# Altium PCB PCB_Lumo_Squisho.PcbDoc
Units mil, origin at the board's own origin, x right, y up, seen from the top; angles counter-clockwise.
Board outline 3070.87 x 2775.59 mil, 4 copper layers (Top Layer, MID_1, MID_2, Bottom Layer), stack 23.756 mil thick; 36 components, 37 nets, 173 pads, 58 vias.
Unrouted connection lines stored in the file: 1.
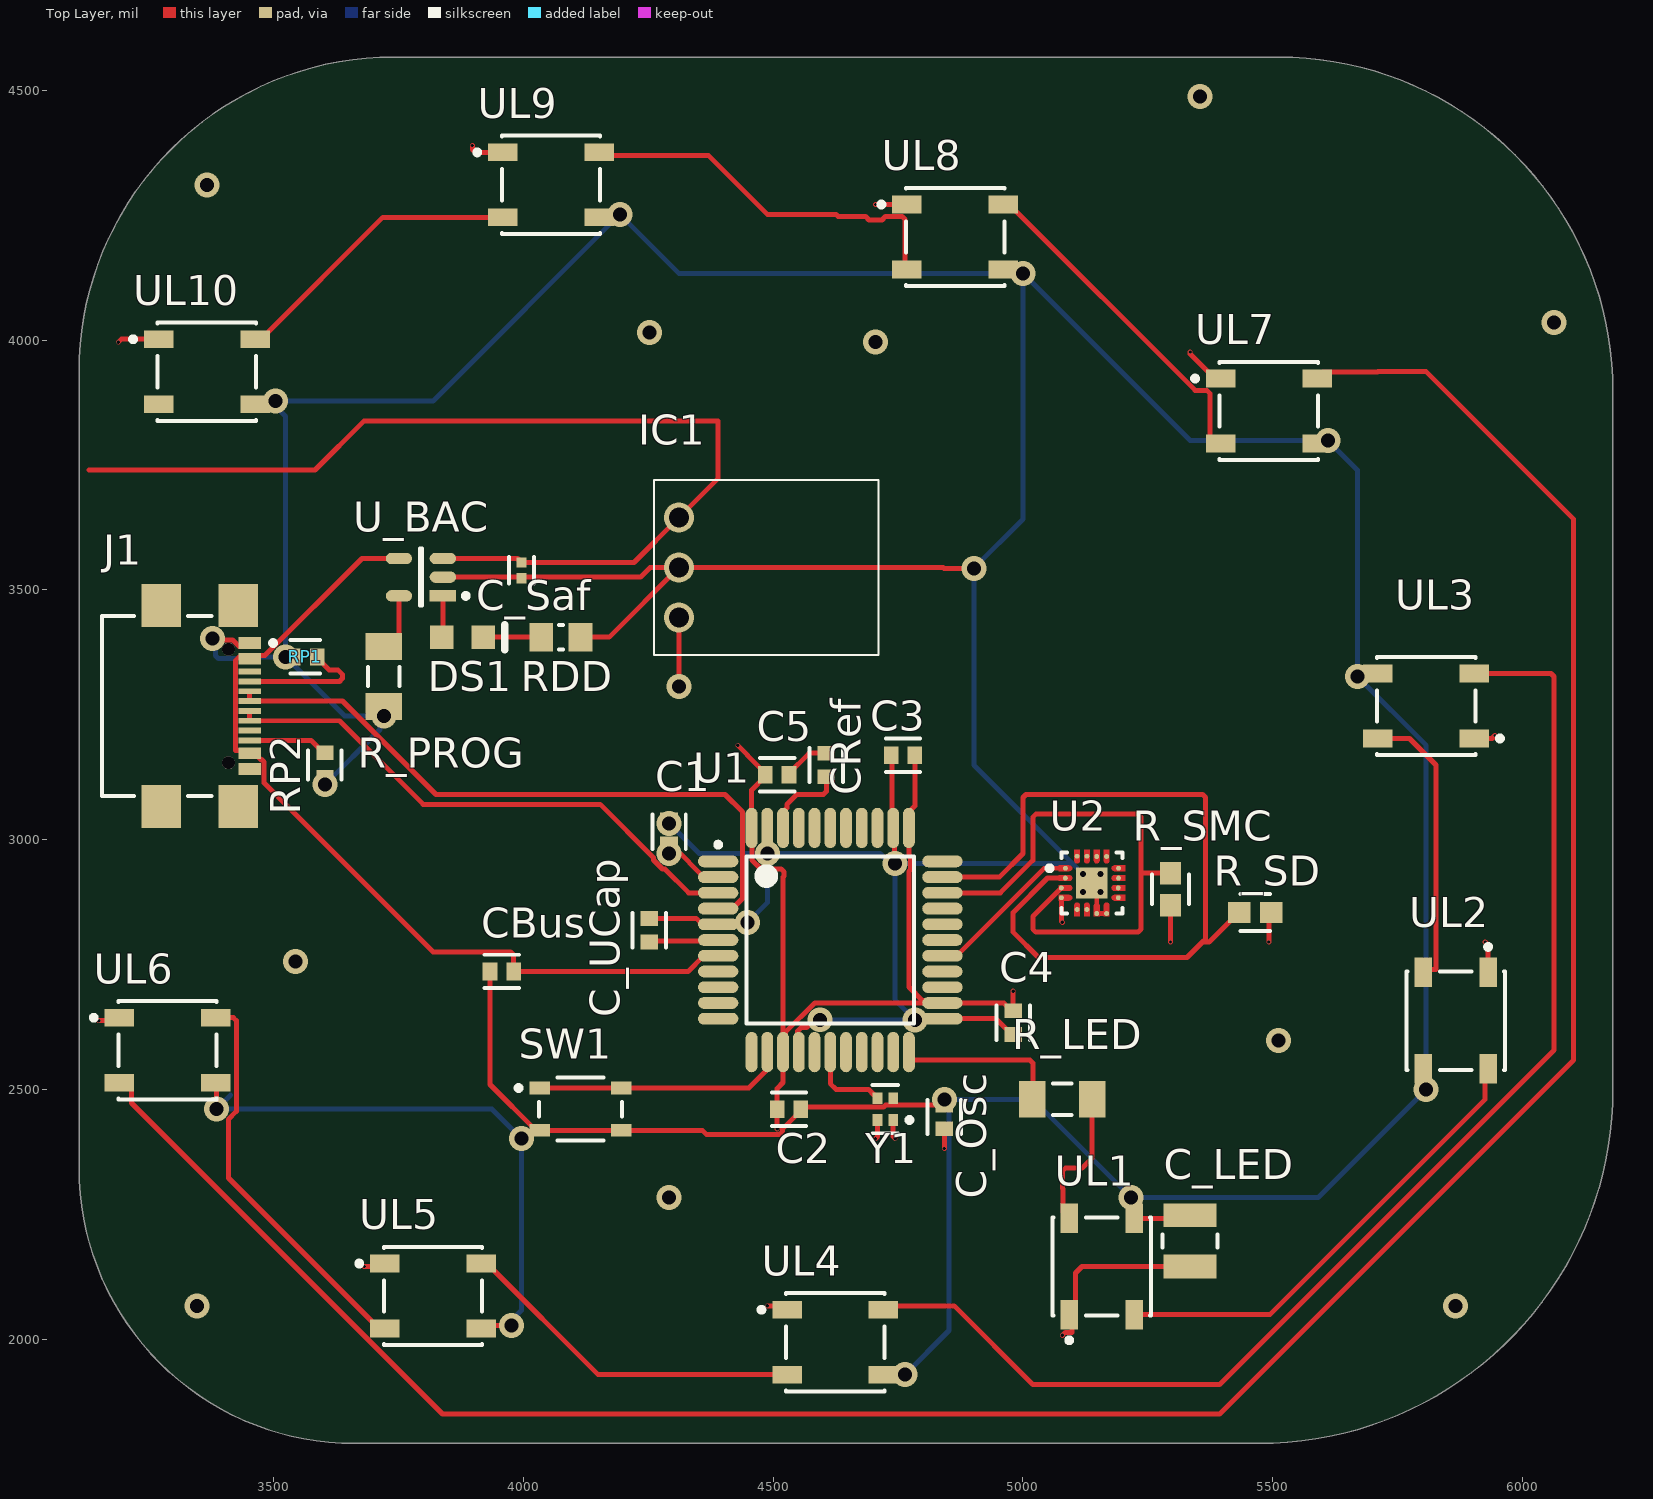
[diagram p0: Top Layer view]
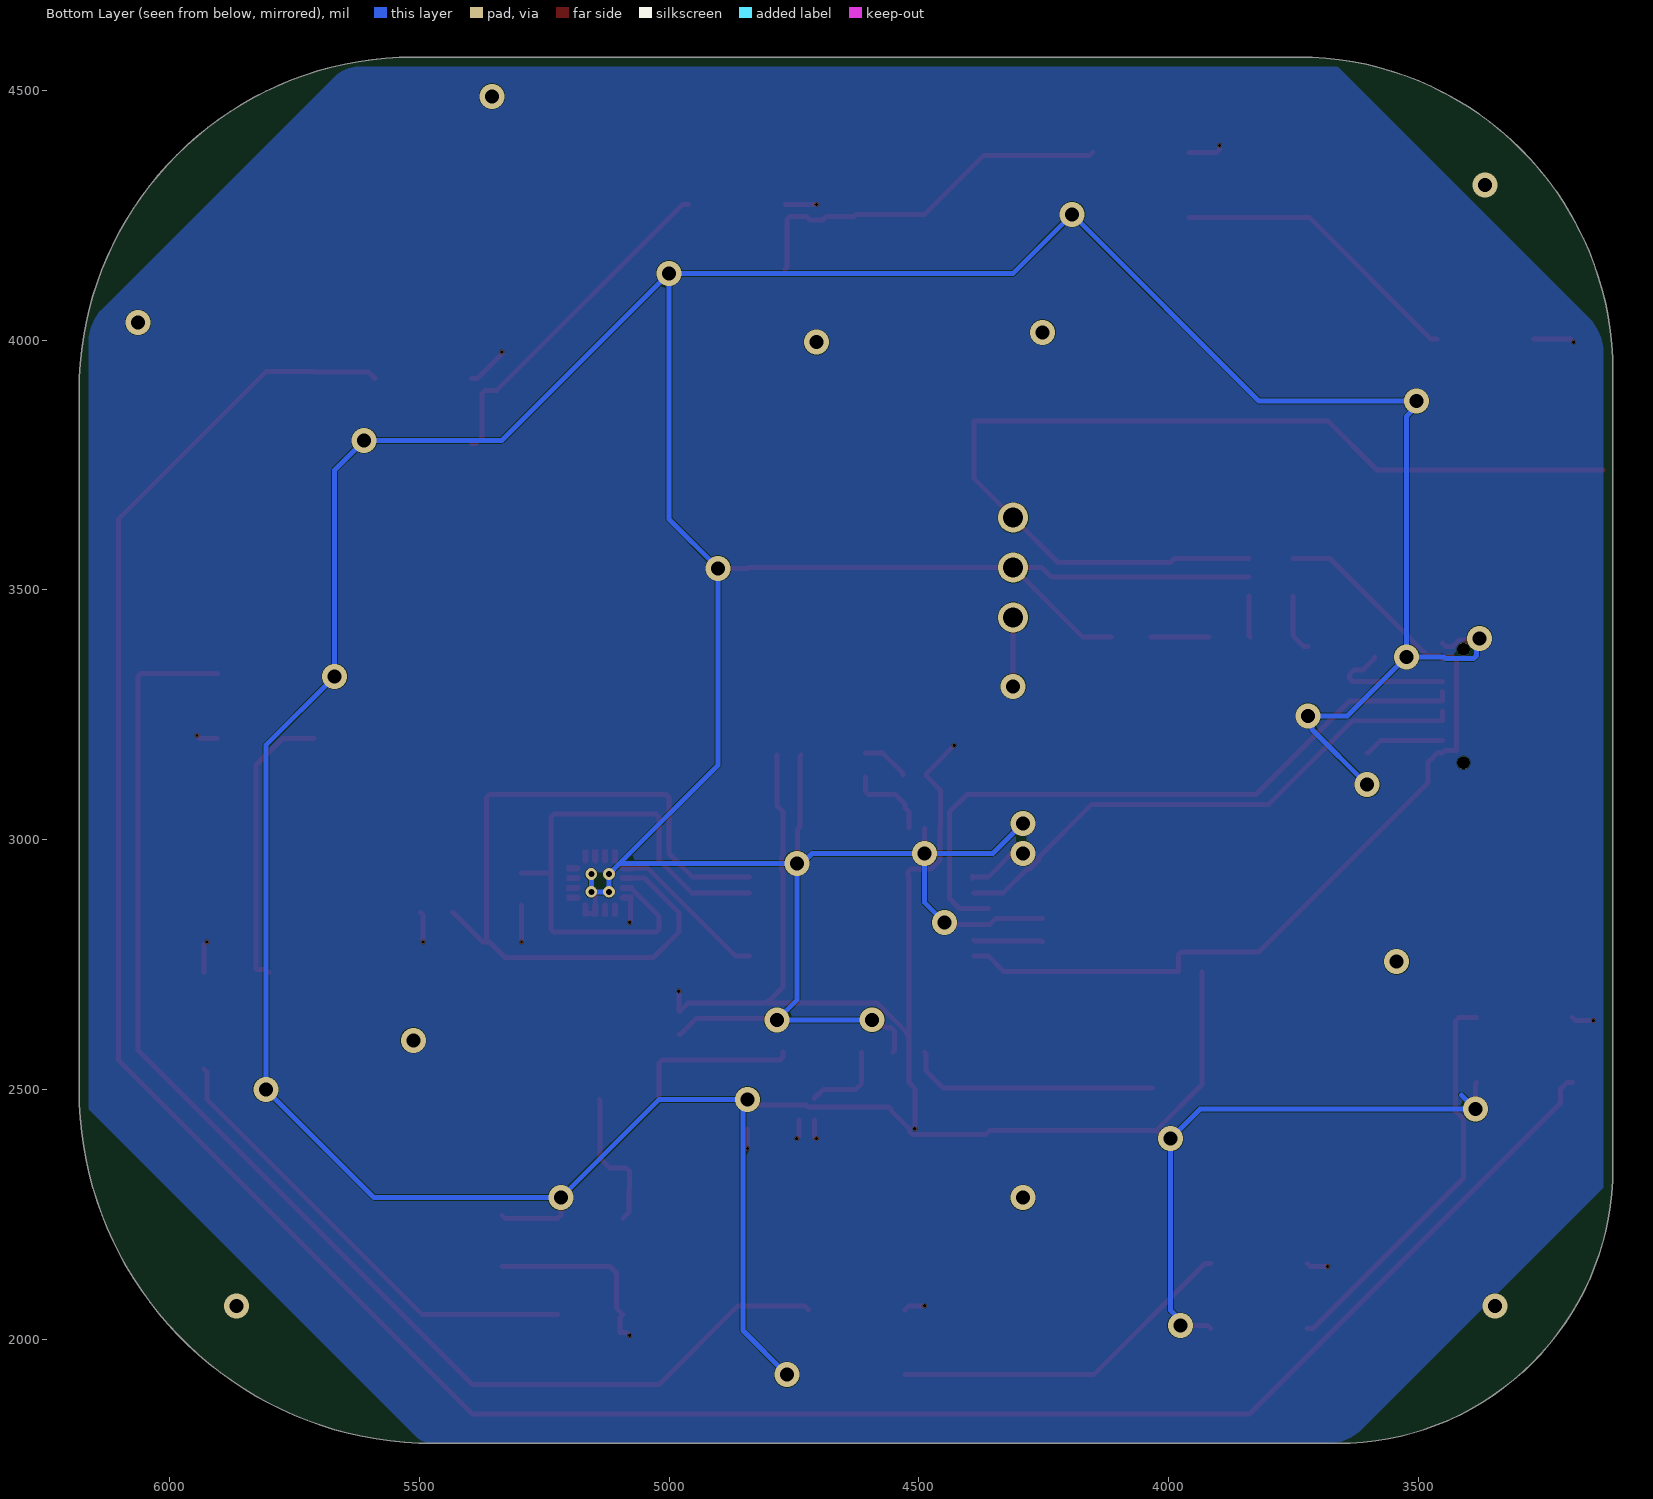
[diagram p1: Bottom Layer view, seen from below]
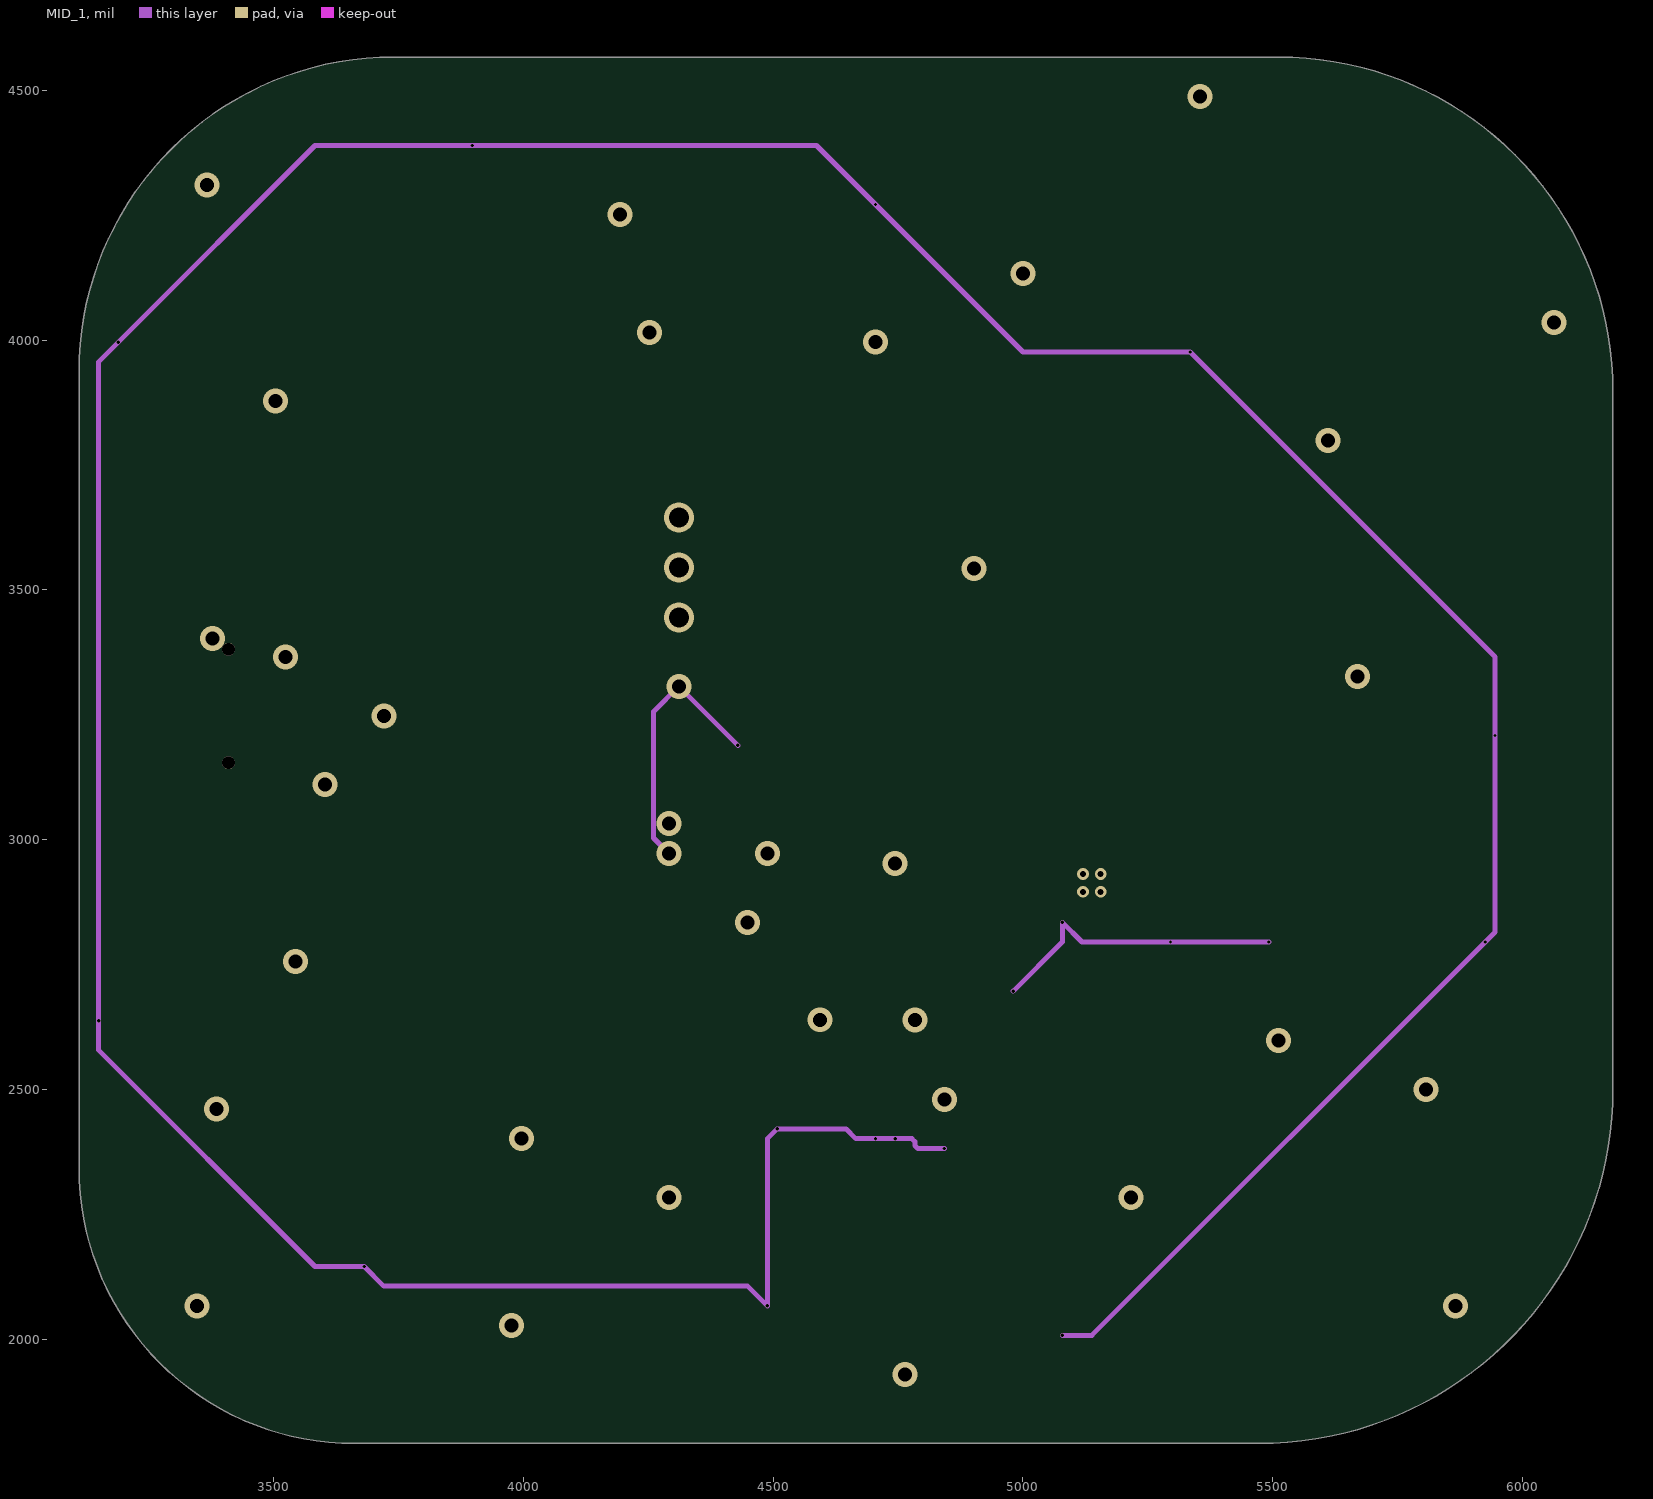
[diagram p2: MID_1]
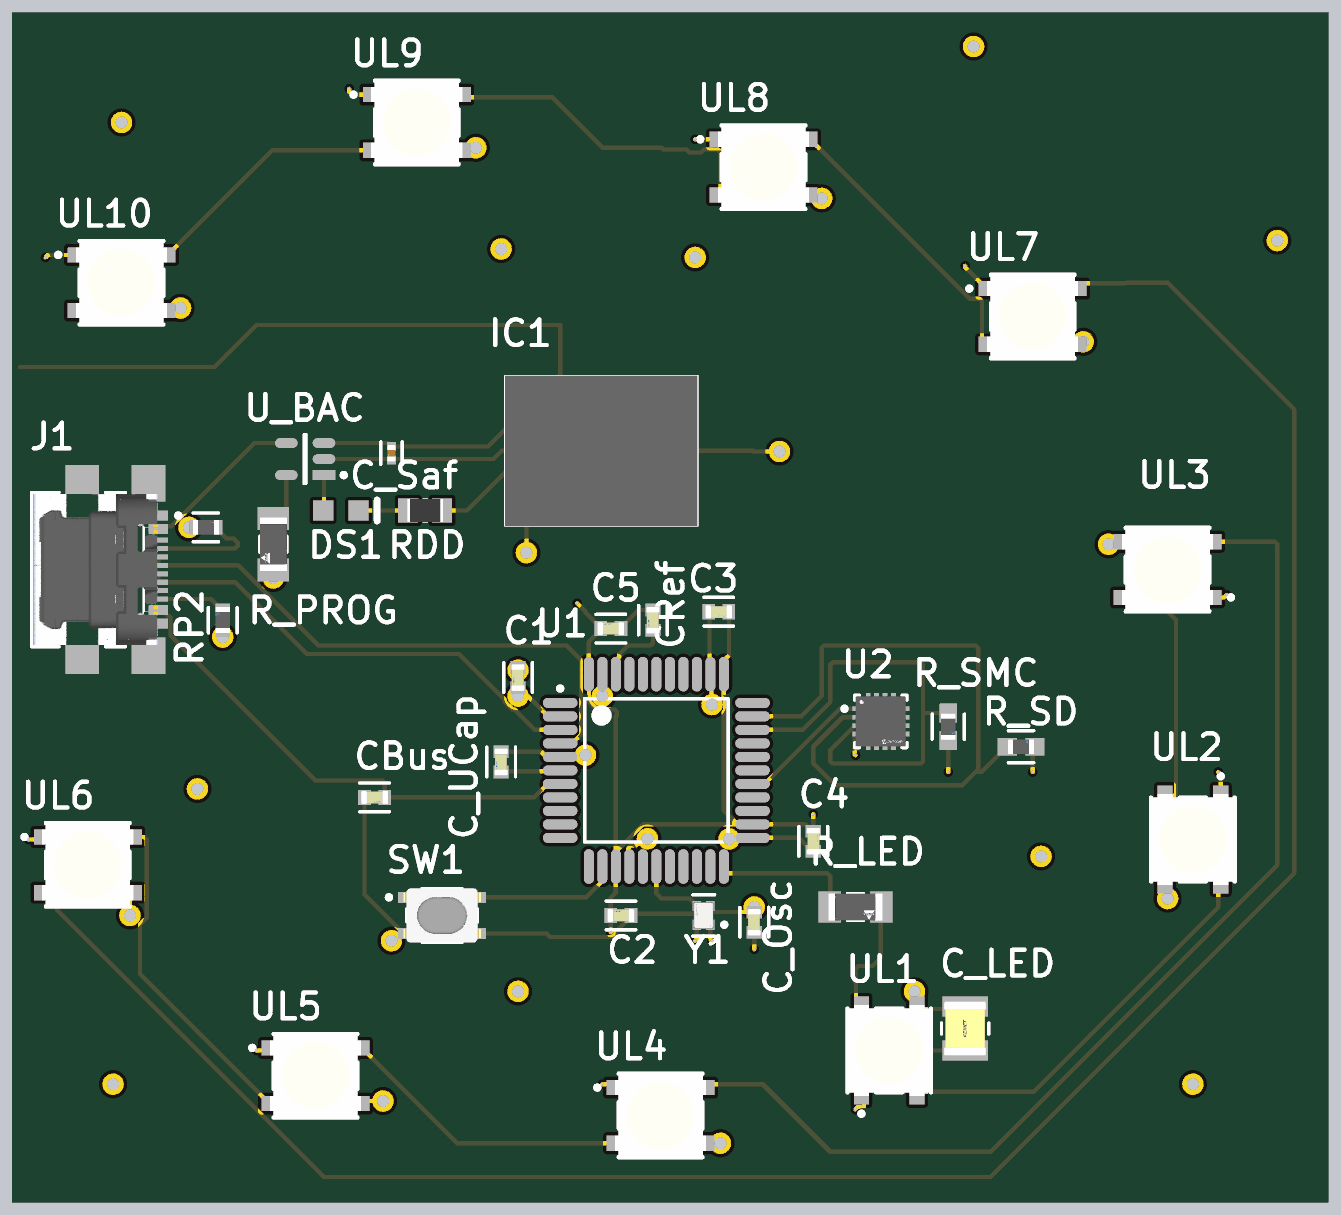
[diagram p3: 3D render of the assembled board from above, using the file's embedded part models]

## Layer stack, top to bottom
Top Solder: solder mask 0.4, Solder Resist, Dk 3.5
Top Layer: signal copper 1.4
Dielectric 2: prepreg 2.8, PP-006, Dk 4.1
MID_1: signal copper 1.378
Dielectric 1: dielectric 12.6, FR-4, Dk 4.8
MID_2: signal copper 1.378
Dielectric 3: prepreg 2.8, PP-006, Dk 4.1
Bottom Layer: signal copper 1.4
Bottom Solder: solder mask 0.4, Solder Resist, Dk 3.5

## Board outline
3661.42,1791.34 5472.44,1791.34 ccw(c5472.44,2500) 6181.1,2500 6181.1,3897.64 ccw(c5511.81,3897.64) 5511.81,4566.93 3740.16,4566.93 ccw(c3740.15,3937.01) 3110.24,3937.01 3110.24,2342.52 ccw(c3661.42,2342.52)

## Design rules (kind name [scope] priority, off if disabled: settings)
Clearance [All] p1: gap=1 ignorepadtopadclearanceinfootprint=FALSE
PolygonConnect [All] p1: connectstyle=Relief reliefconductorwidth=10 reliefentries=4 polygonreliefangle="90 Angle" airgapwidth=10
RoutingVias [All] p1: holewidth=28 width=50 viastyle="Through Hole" minholewidth=28 minwidth=50 maxholewidth=28 maxwidth=50
SilkToSilkClearance [All] p1: silktosilkclearance=1
SolderMaskExpansion [All] p1: expansion=8 istentingtop=FALSE
SupplyNets "Schematic Supply Nets" [InNet('GND')] p1: voltage=0.000
Width [All] p1: maxlimit=10 minlimit=10 preferedwidth=10
29 further rules are at their usual default settings.

## Components (designator, comment, footprint, x,y, rotation, side; value= is the part's Value field where it differs from the comment)
C1 "C0603C104K4RACTU" FP-C0603C-CF-MFG 4291.34,3015.75 r90 top value="0.10 μF"
C2 "C0603C104K4RACTU" FP-C0603C-CF-MFG 4531.5,2460.63 r0 top value="0.10 μF"
C3 "C0603C104K4RACTU" FP-C0603C-CF-MFG 4759.84,3169.29 r180 top value="0.10 μF"
C4 "C0603C104K4RACTU" FP-C0603C-CF-MFG 4980.31,2633.86 r270 top value="0.10 μF"
C5 "C0603C104K4RACTU" FP-C0603C-CF-MFG 4507.87,3129.92 r0 top value="0.10 μF"
C_LED "C1210C107M4PACTU" FP-C1210C-FS-MFG 5334.65,2196.85 r90 top
C_Osc "C0603C104K4RACTU" FP-C0603C-CF-MFG 4842.52,2444.88 r90 top value="0.10 μF"
C_Saf "C0402C105K8PACTU" FP-C0402C105K8PACTU-MFG 3996.06,3539.37 r270 top
C_UCap "C0603C104K4RACTU" FP-C0603C-CF-MFG 4251.97,2818.9 r90 top value="0.10 μF"
CBus "C0603C104K4RACTU" FP-C0603C-CF-MFG 3956.69,2736.22 r180 top value="0.10 μF"
CRef "C0603C104K4RACTU" FP-C0603C-CF-MFG 4606.3,3149.61 r90 top value="0.10 μF"
DS1 "HSMG-C170" AVAG-HSMX-C170_V 3877.95,3405.51 r0 top
IC1 "U1V10F5" U1V10F5 4311.02,3644.88 r270 top
J1 "USB4110-GF-A" FP-USB4110-GF-A-MFG 3307.09,3267.72 r270 top
R_LED "CRCW1206330RFKEA" FP-CRCW1206-e3-IPC_A 5078.74,2480.32 r0 top
R_PROG "CRCW12062K00FKEA" FP-CRCW1206-e3-IPC_A 3720.47,3326.77 r270 top
R_SD "CRCW06034K70FKEA" FP-CRCW0603-e3-IPC_A 5465.17,2854.33 r0 top
R_SMC "CRCW06034K70FKEA" FP-CRCW0603-e3-IPC_A 5295.28,2900.97 r270 top
RDD "RC0805FR-071KL" RESC2013X60X35ML10T20 4074.8,3405.51 r0 top
RP1 "CRCW06035K10FKEA" FP-CRCW0603-e3-IPC_C 3562.99,3366.14 r0 top
RP2 "CRCW06035K10FKEA" FP-CRCW0603-e3-IPC_C 3602.36,3149.61 r90 top
SW1 "PTS810SJM250SMTRLFS" FP-PTS810SJM250SMTRLFS-MFG 4114.17,2460.63 r0 top
U1 "ATmega32U4-AU" 44ML_M 4614.17,2799.21 r0 top
U2 "CAP1208-1-A4-TR" FP-CAP1208-1-A4-TR-MFG 5137.8,2913.39 r0 top
U_BAC "MCP73831T-2ACI/OT" FP-C04-091-OT-IPC_B 3794.64,3525.59 r180 top
UL1 "1655" ADA-RGB-1655_V 5157.48,2145.67 r90 top
UL2 "1655" ADA-RGB-1655_V 5866.14,2637.8 r270 top
UL3 "1655" ADA-RGB-1655_V 5807.09,3267.72 r180 top
UL4 "1655" ADA-RGB-1655_V 4624.02,1994.09 r0 top
UL5 "1655" ADA-RGB-1655_V 3818.9,2086.61 r0 top
UL6 "1655" ADA-RGB-1655_V 3287.4,2578.74 r0 top
UL7 "1655" ADA-RGB-1655_V 5492.13,3858.27 r0 top
UL8 "1655" ADA-RGB-1655_V 4864.17,4206.69 r0 top
UL9 "1655" ADA-RGB-1655_V 4055.12,4311.02 r0 top
UL10 "1655" ADA-RGB-1655_V 3366.14,3937.01 r0 top
Y1 "ASCO-16.000MHZ-EK-T" FP-ASCO-MFG 4724.41,2460.63 r90 top

## Footprints (in the part's own frame and the unit in brackets; to place one, negate y for a bottom-side part, rotate by r counter-clockwise, add the part's x,y. Pads: shape width x height; smd on the part's side, far side on the other; paste and mask are expansions set on the pad)
44ML_M [mm] "Thin QFP, 44-Leads, Body 10x10mm, Pitch 0.8mm, IPC Low Density"
  oval 2.05x0.6 smd: 1(-5.7,4) 2(-5.7,3.2) 3(-5.7,2.4) 4(-5.7,1.6) 5(-5.7,0.8) 6(-5.7,0) 7(-5.7,-0.8) 8(-5.7,-1.6) 9(-5.7,-2.4) 10(-5.7,-3.2) 11(-5.7,-4) 23(5.7,-4) 24(5.7,-3.2) 25(5.7,-2.4) 26(5.7,-1.6) 27(5.7,-0.8) 28(5.7,0) 29(5.7,0.8) 30(5.7,1.6) 31(5.7,2.4) 32(5.7,3.2) 33(5.7,4)
  oval 0.6x2.05 smd: 12(-4,-5.7) 13(-3.2,-5.7) 14(-2.4,-5.7) 15(-1.6,-5.7) 16(-0.8,-5.7) 17(0,-5.7) 18(0.8,-5.7) 19(1.6,-5.7) 20(2.4,-5.7) 21(3.2,-5.7) 22(4,-5.7) 34(4,5.7) 35(3.2,5.7) 36(2.4,5.7) 37(1.6,5.7) 38(0.8,5.7) 39(0,5.7) 40(-0.8,5.7) 41(-1.6,5.7) 42(-2.4,5.7) 43(-3.2,5.7) 44(-4,5.7)
  silkscreen extent -5.82,-4.25 4.25,4.97, body extent -5,-5 5,5, height 1.2
ADA-RGB-1655_V [mm] "SMD, 4-Leads, Body 5x5mm"
  rect 1.5x0.9 smd: 1(-2.45,1.65) 2(-2.45,-1.65) 3(2.45,-1.65) 4(2.45,1.65)
  silkscreen extent -3.87,-2.5 2.5,2.5, body extent -2.7,-2.5 2.7,2.5, height 1.68
AVAG-HSMX-C170_V [mm] "SMD, 2-Leads, Body 2x1.25mm, Height 0.8mm"
  rect 1.2x1.2 smd: 1(-1.05,0) 2(1.05,0)
  silkscreen extent 2.15,-0.63 2.15,0.63, body extent -1,-0.63 1,0.63, height 0.8
FP-ASCO-MFG [mm]
  rect 0.6x0.5 smd paste+0 mask+0: 1(-0.55,-0.4) 2(0.55,-0.4) 3(0.55,0.4) 4(-0.55,0.4)
  silkscreen extent -1.22,-1.35 1.22,0.65, body extent -0.95,-0.75 0.95,0.75, height 0.25
FP-C04-091-OT-IPC_B [mm]
  rect 1.338x0.578 smd paste+0 mask+0: 1(-1.116,0.95)
  rrect100% 1.338x0.578 smd paste+0 mask+0: 2(-1.116,0) 3(-1.116,-0.95) 4(1.116,-0.95) 5(1.116,0.95)
  silkscreen extent -2.41,-1.45 0.05,1.45
FP-C0402C105K8PACTU-MFG [mm]
  rect 0.52x0.52 smd paste+0 mask+0: 1(-0.4,0) 2(0.4,0)
  silkscreen extent -0.67,-0.64 0.67,0.64, body extent -0.8,-0.4 0.8,0.4, height 0.25
FP-C0603C-CF-MFG [mm]
  rect 0.75x0.9 smd paste+0 mask+0: 1(-0.6,0) 2(0.6,0)
  silkscreen extent -0.87,-0.85 0.88,0.85, body extent -1.2,-0.6 1.2,0.6, height 0.25
FP-C1210C-FS-MFG [mm]
  rect 1.2x2.7 smd paste+0 mask+0: 1(-1.3,0) 2(1.3,0)
  silkscreen extent -0.33,-1.4 0.33,1.4, body extent -2,-1.5 2,1.5, height 0.25
FP-CAP1208-1-A4-TR-MFG [mm]
  round 0.252 smd paste+0 mask+0: 1(-1.345,0.75) 2(-1.345,0.25) 3(-1.55,-0.25) 4(-1.55,-0.75) 5(-0.75,-1.345) 6(-0.25,-1.345) 7(0.25,-1.55) 8(0.75,-1.55) 9(1.345,-0.75) 10(1.345,-0.25) 11(1.359,0.25) 12(1.359,0.75) 13(0.75,1.345) 14(0.25,1.345) 15(-0.25,1.359) 16(-0.75,1.359)
  rect 1.6x1.6 smd paste+0 mask+0: 17(0,0)
  Top Layer region: -0.61,1.69 -0.61,1.14 -0.621,1.086 -0.651,1.041 -0.696,1.011 -0.75,1 -0.75,1 -0.804,1.011 -0.849,1.041 -0.879,1.086 -0.89,1.14 -0.89,1.14 -0.89,1.69
  Top Layer region: -0.11,1.69 -0.11,1.14 -0.121,1.086 -0.151,1.041 -0.196,1.011 -0.25,1 -0.25,1 -0.304,1.011 -0.349,1.041 -0.379,1.086 -0.39,1.14 -0.39,1.14 -0.39,1.69
  Top Layer region: 0.39,1.69 0.39,1.14 0.379,1.086 0.349,1.041 0.304,1.011 0.25,1 0.25,1 0.196,1.011 0.151,1.041 0.121,1.086 0.11,1.14 0.11,1.14 0.11,1.69
  Top Layer region: 0.89,1.69 0.89,1.14 0.879,1.086 0.849,1.041 0.804,1.011 0.75,1 0.75,1 0.696,1.011 0.651,1.041 0.621,1.086 0.61,1.14 0.61,1.14 0.61,1.69
  Top Layer region: 1.69,0.61 1.14,0.61 1.086,0.621 1.041,0.651 1.011,0.696 1,0.75 1,0.75 1.011,0.804 1.041,0.849 1.086,0.879 1.14,0.89 1.14,0.89 1.69,0.89
  Top Layer region: 1.69,0.11 1.14,0.11 1.086,0.121 1.041,0.151 1.011,0.196 1,0.25 1,0.25 1.011,0.304 1.041,0.349 1.086,0.379 1.14,0.39 1.14,0.39 1.69,0.39
  Top Layer region: 1.69,-0.39 1.14,-0.39 1.086,-0.379 1.041,-0.349 1.011,-0.304 1,-0.25 1,-0.25 1.011,-0.196 1.041,-0.151 1.086,-0.121 1.14,-0.11 1.14,-0.11 1.69,-0.11
  Top Layer region: 1.69,-0.89 1.14,-0.89 1.086,-0.879 1.041,-0.849 1.011,-0.804 1,-0.75 1,-0.75 1.011,-0.696 1.041,-0.651 1.086,-0.621 1.14,-0.61 1.14,-0.61 1.69,-0.61
  Top Layer region: 0.61,-1.69 0.61,-1.14 0.621,-1.086 0.651,-1.041 0.696,-1.011 0.75,-1 0.75,-1 0.804,-1.011 0.849,-1.041 0.879,-1.086 0.89,-1.14 0.89,-1.14 0.89,-1.69
  Top Layer region: 0.11,-1.69 0.11,-1.14 0.121,-1.086 0.151,-1.041 0.196,-1.011 0.25,-1 0.25,-1 0.304,-1.011 0.349,-1.041 0.379,-1.086 0.39,-1.14 0.39,-1.14 0.39,-1.69
  Top Layer region: -0.39,-1.69 -0.39,-1.14 -0.379,-1.086 -0.349,-1.041 -0.304,-1.011 -0.25,-1 -0.25,-1 -0.196,-1.011 -0.151,-1.041 -0.121,-1.086 -0.11,-1.14 -0.11,-1.14 -0.11,-1.69
  Top Layer region: -0.89,-1.69 -0.89,-1.14 -0.879,-1.086 -0.849,-1.041 -0.804,-1.011 -0.75,-1 -0.75,-1 -0.696,-1.011 -0.651,-1.041 -0.621,-1.086 -0.61,-1.14 -0.61,-1.14 -0.61,-1.69
  Top Layer region: -1.69,-0.61 -1.14,-0.61 -1.086,-0.621 -1.041,-0.651 -1.011,-0.696 -1,-0.75 -1,-0.75 -1.011,-0.804 -1.041,-0.849 -1.086,-0.879 -1.14,-0.89 -1.14,-0.89 -1.69,-0.89
  Top Layer region: -1.69,-0.11 -1.14,-0.11 -1.086,-0.121 -1.041,-0.151 -1.011,-0.196 -1,-0.25 -1,-0.25 -1.011,-0.304 -1.041,-0.349 -1.086,-0.379 -1.14,-0.39 -1.14,-0.39 -1.69,-0.39
  Top Layer region: -1.69,0.39 -1.14,0.39 -1.086,0.379 -1.041,0.349 -1.011,0.304 -1,0.25 -1,0.25 -1.011,0.196 -1.041,0.151 -1.086,0.121 -1.14,0.11 -1.14,0.11 -1.69,0.11
  Top Layer region: -1.69,0.89 -1.14,0.89 -1.086,0.879 -1.041,0.849 -1.011,0.804 -1,0.75 -1,0.75 -1.011,0.696 -1.041,0.651 -1.086,0.621 -1.14,0.61 -1.14,0.61 -1.69,0.61
  silkscreen extent -2.27,-1.55 1.55,1.55, body extent -1.79,-1.79 1.79,1.79, height 0.25
FP-CRCW0603-e3-IPC_A [mil]
  rect 44.69x41.82 smd paste+0 mask+0: 1(-32.1,0) 2(32.1,0)
  silkscreen extent -30,-37 30,37, body extent -74,-41 74,41, height 10
FP-CRCW0603-e3-IPC_C [mil]
  rect 28.94x33.94 smd paste+0 mask+0: 1(-24.23,0) 2(24.23,0)
  silkscreen extent -30,-33 30,33, body extent -43,-23 43,23, height 10
FP-CRCW1206-e3-IPC_A [mil]
  rect 53.39x73.16 smd paste+0 mask+0: 1(-60.08,0) 2(60.08,0)
  silkscreen extent -19,-31 19,31, body extent -106,-56 106,56, height 10
FP-PTS810SJM250SMTRLFS-MFG [mm]
  rect 1.05x0.65 smd paste+0 mask+0: 1(-2.075,1.075) 2(2.075,1.075) 3(-2.075,-1.075) 4(2.075,-1.075)
  silkscreen extent -3.27,-1.6 2.1,1.6, body extent -2.7,-1.7 2.7,1.7, height 0.25
FP-USB4110-GF-A-MFG [mm]
  rect 2.18x2 smd paste+0 mask+0: 1(-5.11,3.105) 2(5.11,3.105) 3(-5.11,-0.825) 4(5.11,-0.825)
  rect 0.6x1.15 smd paste+0 mask+0: A1-B12(-3.2,3.68) A4-B9(-2.4,3.68) B1-A12(3.2,3.68) B4-A9(2.4,3.68)
  rect 0.3x1.15 smd paste+0 mask+0: A5(-1.25,3.68) A6(-0.25,3.68) A7(0.25,3.68) A8(1.25,3.68) B5(1.75,3.68) B6(0.75,3.68) B7(-0.75,3.68) B8(-1.75,3.68)
  round 0.65 hole 0.65 unplated paste-2539.97 mask+0: ""(-2.89,2.605) ""(2.89,2.605)
  silkscreen extent -4.57,-3.83 4.57,4.99, body extent -6.3,-3.92 6.3,4.36, height 0.25
RESC2013X60X35ML10T20 [mm] "Chip Resistor, 2-Leads, Body 2.1x1.35mm, IPC Low Density"
  rect 1.2x1.45 smd: 1(-1,0) 2(1,0)
  silkscreen extent -0.1,-0.63 0.1,0.63, body extent -1.05,-0.68 1.05,0.67, height 0.6
U1V10F5 [mm]
  round 1.53 hole 1.02: 1(0,0) 2(2.54,0) 3(5.08,0)
  silkscreen extent -1.91,-1.27 6.99,10.16, body extent -1.91,-1.27 6.99,10.13, height 2.82

## Part data
C1 C2 C3 C4 C5 C_Osc C_UCap CBus CRef: library part CMP-2006-03811-3, "Capacitor; Ceramic; Cap; .100uF; Tol 10%; SMT; Vol-Rtg 16V; X7R; Tape and Reel", Capacitance="0.10 μF", Manufacturer=KEMET, Package=C0603C-CF, Temperature="-55°C to +125°C", Temperature Characteristic=X7R, Temperature Coefficient=30ppm/°C, Temperature Range High=+125°C, Temperature Range Low=-55°C, Tolerance=0.1, Voltage Rating="16 V", Automotive=Yes, Automotive Grade="Grade 1", Category=Cap, ComponentLink2Description=Datasheet, ComponentLink2URL=https://api.kemet.com/component-edge/download/datasheet/C0603C100J5GACAUTO.pdf, Device Class L1="Passive Components", Device Class L2=Capacitors, Device Class L3="Ceramic Capacitors", Digikey Description="Capacitor; Ceramic; Cap; .100uF; Tol 10%; SMT; Vol-Rtg 16V; X7R; Tape and Reel", Height=0.87mm, Lead Free=Yes, Manufacturer Part Number=C0603C104K4RACTU, Material=Ceramic, Mouser Description="Multilayer Ceramic Capacitors MLCC - SMD/SMT 16volts 0.1uF 10% X7R 10%", Octopart=https://octopart.com/c0603c104k4ractu-kemet-93067, RoHS=TRUE
C_LED: library part CMP-03020-034653-1, "CAP CER 100UF 16V X5R 1210", Capacitance=100uF, Case Code (Imperial)=1210, Case Code (Metric)=3225, Dielectric=X5R, Dielectric Material=Ceramic, Max Operating Temperature=85°C, Min Operating Temperature=-55°C, Package Quantity=1000, Tolerance=20%, Voltage Rating=16V, Case/Package=1210, Depth=2.5mm, Lead Free="Lead Free", Length=3.2mm, Packaging="Tape and Reel", REACH SVHC="No SVHC", Termination=SMD/SMT, Thickness=0.106inch, Voltage Rating (DC)=16V, Weight=0.000564oz, Width=0.098inch
C_Saf: library part CMP-2008-02081-2, "CAP CER 1UF 10V X5R 0402", Capacitance=1uF, Case Code (Imperial)=0402, Case Code (Metric)=1005, Dielectric=X5R, Dielectric Material=Ceramic, Max Operating Temperature=85°C, Min Operating Temperature=-55°C, Package Quantity=1, Tolerance=10%, Voltage=10V, Case/Package=0402, Construction=Flat, Contact Plating=Tin, Depth=0.5mm, Dissipation Factor=5%, Height=0.5mm, Lead Free="Lead Free", Length=1mm, Mount="Surface Mount", Number of Pins=2, Packaging="Tape and Reel", Radiation Hardening=No, REACH SVHC="No SVHC", RoHS Compliant=Yes, Series=C, Termination=SMD/SMT, Thickness=0.022inch, Voltage Rating=10V, Voltage Rating (DC)=10V, Width=0.5mm
DS1: library part CMP-2000-05062-1, "Chip LED, Green, 2.2 V, -40 to 85 degC, 2-Pin SMD, Pb-Free, Tape and Reel", Forward Current If=20mA, Forward Voltage=2.2V, Forward Voltage VF Max=2.6V, LED Colour=Green, Manufacturer=Avago, Operating Temperature Max=85degC, Operating Temperature Min=-30degC, Operating Temperature Range=-30degCto+85degC, Opto Case Style=SMD, Package Description="2-Pin Surface Mount Device, Body 2 x 1.25 mm, Height 0.8 mm", Package Reference=HSMX-C170, Storage Temperature Min=-40degC, Bulb Size=1.25mmx1.4mm, Datasheet URL=https://datasheet.ciiva.com/29280/180495-da-01-en-chip-led-hsmg-c170-gelb-gruen-29280971.pdf, Datasheet Version=Oct-08, Dominant Wavelength=572nm, Dominant Wavelength Typ=572nm, External Depth=0.8mm, External Length / Height=2mm, External Width=1.25mm, Forward Current If Max=20mA, LED Mounting=SMD, LED Type=Standard, Lens Shape=Rectangular, Light Area Height=1mm, Luminous Intensity=15mcd, Luminous Intensity Min=4mcd, Luminous Intensity Typ=15mcd, Manufacturer URL=http://www.avagotech.com/, Mounting Type=SMD, MSL=MSL2A-4weeks, No. of Pins=2, Opto Mounting Orientation=Top, Packaging=CutTape, Peak Forward Current=20mA, Peak Wavelength=570nm, PIV Max=5V, Storage Temperature Max=85degC, SVHC=NoSVHC(16-Jun-2014), Viewing Angle=170deg, Voltage Vf Typ=2.2V, Wavelength Typ=570nm
IC1: "Integrated Circuit", Manufacturer_Name=Pololu, Datasheet Link=https://www.pololu.com/product/2564, Height=2.72mm, Manufacturer_Part_Number=U1V10F5
J1: library part CMP-245163-000002-1, "CONN USB 2.0 TYPE-C R/A SMT", Current Rating=3/4.25/1.25/0.25A, Manufacturer=GCT, Package=0, Temperature="-40°C to +85°C", Temperature Range High=+85°C, Temperature Range Low=-40°C, Voltage Rating=20V, Automotive=No, Category=Conn, ComponentLink2Description=Datasheet, ComponentLink2URL=https://gct.co/files/drawings/usb4110.pdf, Conn Orientation="Right Angle", Contact Material=Gold,Nickel, Device Class L1=Connectors, Device Class L2="USB Connectors", Device Class L3=unset, Digikey Description="CONN USB 2.0 TYPE-C R/A SMT", Height=3.46mm, Is Female=yes, Lead Free=Yes, Manufacturer Part Number=USB4110-GF-A, Number Of Contacts=16, Octopart=https://octopart.com/usb4110-gf-a-gct-103941985, RoHS=TRUE, Shielding=true, Standoff Height=0.1mm, Usb Standard="USB 2.0"
R_LED: library part CMP-2003-02098-2, "RES Thick Film, 330Ω, 1%, 0.25W, 100ppm/°C, 1206", Case Code (Imperial)=1206, Case Code (Metric)=3216, Max Operating Temperature=155°C, Max Power Dissipation=250mW, Min Operating Temperature=-55°C, Package Quantity=10, Resistance=330R, Temperature Coefficient=100ppm/°C, Tolerance=1%, Voltage Rating=200V, Case/Package=1206, Composition="Thick Film", Contact Plating=Tin, Depth=1.6mm, Features="Automotive AEC-Q200", Height=0.55mm, Lead Free="Lead Free", Length=3.2mm, Military Standard=Not, Mount="Surface Mount", Number of Terminations=2, Packaging="Tape and Reel", Power Rating=250mW, Radiation Hardening=No, Termination=SMD/SMT, Voltage Rating (DC)=200V, Weight=0.000353oz, Width=1.6mm
R_PROG: library part CMP-1014-00542-3, "RES Thick Film, 2kΩ, 1%, 0.25W, 100ppm/°C, 1206", Case Code (Imperial)=1206, Case Code (Metric)=3216, Max Operating Temperature=155°C, Max Power Dissipation=250mW, Min Operating Temperature=-55°C, Package Quantity=10, Resistance=2kR, Temperature Coefficient=100ppm/°C, Tolerance=1%, Voltage Rating=200V, Case/Package=1206, Composition="Thick Film", Contact Plating=Tin, Depth=1.6mm, Features="Automotive AEC-Q200", Height=0.55mm, Length=3.2mm, Military Standard=Not, Mount="Surface Mount", Number of Pins=2, Number of Terminations=2, Packaging="Tape and Reel", Power Rating=250mW, Radiation Hardening=No, Termination=SMD/SMT, Weight=0.000353oz, Width=1.6mm
R_SD R_SMC: library part CMP-1666-00019-3, "RES Thick Film, 4.7kΩ, 1%, 0.1W, 100ppm/°C, 0603", Case Code (Imperial)=0603, Case Code (Metric)=1608, Max Operating Temperature=155°C, Min Operating Temperature=-55°C, Package Quantity=5000, Power Rating=100mW, Resistance=4.7kR, Temperature Coefficient=100ppm/°C, Tolerance=1%, Voltage Rating=75V, Case/Package=0603, Composition="Thick Film", Contact Plating=Tin, Depth=0.85mm, Height=0.45mm, Lead Free="Lead Free", Length=1.55mm, Military Standard=Not, Mount="Surface Mount", Packaging="Tape and Reel", Termination=SMD/SMT, Voltage Rating (DC)=75V, Weight=7.1E-05oz, Width=0.85mm
RDD: library part CMP-2100-03671-1, "Chip Resistor, 1 KOhm, +/- 1%, 125 mW, -55 to 155 degC, 0805 (2012 Metric), RoHS, Tape and Reel", Case Code (Imperial)=0805, Case Code (Metric)=2012, Manufacturer=Yageo, Max Operating Temperature=155degC, Max Power Dissipation=125mW, Min Operating Temperature=-55degC, Package Description="2-Pin Surface Mounted Device, Body 2 x 1.25 mm", Package Quantity=1, Resistance=1KOhm, Temperature Coefficient=100ppm/degreesC, Tolerance=1%, Voltage Rating=150V, Case/Package=0805, Composition=ThickFilm, Datasheet URL=http://www.yageo.com/NewPortal/yageodocoutput?fileName=/pdf/R-Chip/PYu-RC_Group_51_RoHS_L_5.pdf, Datasheet Version="Rev. 5, 10/2016", Depth=1.25mm, Height=0.024inch, Lead Free=LeadFree, Length=0.079inch, Manufacturer URL=http://www.yageo.com/, Military Standard=Not, Number of Pins=2, Number of Terminations=2, Package Reference=0805, Packaging=TapeandReel, Power Rating=125mW, REACH SVHC=Unknown, RoHSCompliant=true, Termination=SMD/SMT, Voltage Rating (DC)=150V, Width=0.049inch
RP1 RP2: library part CMP-1012-00590-3, "RES Thick Film, 5.1kΩ, 1%, 0.1W, 100ppm/°C, 0603", Case Code (Imperial)=0603, Case Code (Metric)=1608, Max Operating Temperature=155°C, Min Operating Temperature=-55°C, Package Quantity=5000, Power Rating=100mW, Resistance=5.1kR, Temperature Coefficient=100ppm/°C, Tolerance=1%, Voltage Rating=75V, Case/Package=0603, Composition="Thick Film", Contact Plating=Tin, Depth=0.85mm, Height=0.45mm, Lead Free="Lead Free", Length=1.55mm, Military Standard=Not, Mount="Surface Mount", Packaging="Tape and Reel", Radiation Hardening=No, Termination=SMD/SMT, Voltage Rating (DC)=75V, Weight=7.1E-05oz, Width=0.85mm
SW1: library part CMP-10040-000001-2, "SWITCH TACTILE SPST-NO 0.05A 16V", Case/Package=SMD/SMT, Color=Black, Current Rating=50mA, Max Operating Temperature=85°C, Min Operating Temperature=-40°C, Operating Force=160gf, Package Quantity=2900, Voltage Rating (DC)=16V, Actuator Type=Standard, Contact Plating=Silver, Depth=4.6mm, Illumination Type=Non-Illuminated, Lead Free="Lead Free", Length=3.2mm, Max Current Rating=50mA, Mechanical Life=150000Cycles, Mount="Surface Mount", Orientation=Straight, Packaging="Tape and Reel", RoHS Compliant=Yes, Switch Function=Off-Mom, Switch Travel=0.15mm, Termination=J-Bend, Throw Configuration=SPST
U1: library part CMP-0095-00285-2, "8-bit AVR Microcontroller, 2.7-5.5V, 16MHz, 32KB Flash, 1KB EEPROM, 2.5KB SRAM, USB Controller, 44-pin TQFP, Industrial Grade (-40°C to 85°C), Ext Osc", ComponentLink1Description="Manufacturer URL", ComponentLink1URL=http://www.atmel.com/, ComponentLink2Description="ATmega16U4/32U4 Datasheet", ComponentLink2URL=http://www.atmel.com/dyn/resources/prod_documents/doc7766.pdf, ComponentLink3Description="ATmega16U4 ATmega32U4 Summary", ComponentLink3URL=http://www.atmel.com/dyn/resources/prod_documents/7766S.pdf, DatasheetVersion="revF, Nov-2010", PackageDescription="44-Pin Plastic Thin Quad Flat Pack, 10 x 10 x 1.0 mm Body, 0.8 mm Pitch (TQFP)", PackageReference=44ML, PackageVersion="rev.G, Jul-2007", RevisionNote="DatasheetVersion updated. URLs added."
U2: library part CMP-06270-000011-1, "IC TOUCH SENSOR CAP 8CH 16QFN", Case/Package=QFN, Max Operating Temperature=125°C, Max Supply Voltage=5.5V, Min Operating Temperature=-40°C, Min Supply Voltage=3V, Nominal Supply Current=500uA, Operating Supply Voltage=5V, Package Quantity=5000, Interface=I2C, Length=3mm, Mount="Surface Mount", Number of Channels=8, Number of Inputs=8, Number of Pins=16, Operating Supply Current=500uA, Packaging="Tape and Reel", REACH SVHC="No SVHC", RoHS Compliant=Yes, Series=-, Supply Current=500uA, Termination=SMD/SMT, Touchscreen=Capacitive, Width=3mm
U_BAC: library part CMP-0133-00143-2, "IC CONTROLLR LI-ION 4.2V SOT23-5", Case/Package=SOT-23, Drain To Source Resistance=350mR, Max Charge Current=500mA, Max Input Voltage=6V, Max Operating Temperature=85°C, Max Output Voltage=4.5V, Max Power Dissipation=1.54W, Min Operating Temperature=-40°C, Min Output Voltage=4.168V, Min Supply Voltage=3.75V, Output Voltage=4.2V, Voltage Rating=4.534V, Contact Plating=Tin, Height=0.051inch, Lead Free="Lead Free", Length=0.122inch, Max Supply Voltage=6V, Mount="Surface Mount", Number of Cells=1, Number of Channels=1, Number of Outputs=1, Number of Pins=5, Output Current=500mA, Packaging="Tape and Reel", Radiation Hardening=No, REACH SVHC="No SVHC", Termination=SMD/SMT, Weight=0.00709oz, Width=0.071inch
UL1 UL2 UL3 UL4 UL5 UL6 UL7 UL8 UL9 UL10: library part CMP-2000-05026-1, "Intelligent Control LED Integrated Light Source, 3.5 to 5.3 V, -25 to 80 degC, 4-Pin SMD, RoHS, Tape and Reel", Color=Red,Green,Blue(RGB), Manufacturer=Adafruit-Industries-LLC, Package Description="4-Pin Surface Mount Device, Body 5 x 5 mm", Category=Optoelectronics, Configuration=Discrete, Controller Type=-, Datasheet URL=http://datasheet.octopart.com/ADA1655-Adafruit-Industries-datasheet-32028139.pdf, Datasheet Version=May-13, Family=Addressable,Specialty, Interface=-, Manufacturer URL=https://www.adafruit.com/, Mounting Type=SurfaceMount, Number of LEDs=10, Package Reference=1655, Series=Neopixel, Size / Dimension=5.00mmLx5.00mmW, Utilized LED=WS2812(5050)
Y1: library part CMP-27762-012766-1, "Crystal Oscillator 16MHz ±30ppm CMOS 3.3V SMD 1.6x1.2mm", Case/Package=SMD/SMT, Frequency=16MHz, Frequency Stability=30ppm, Load Capacitance=15pF, Max Operating Temperature=70°C, Max Supply Current=4.5mA, Max Supply Voltage=3.63V, Min Operating Temperature=-20°C, Min Supply Voltage=2.97V, Operating Supply Voltage=3.3V, Package Quantity=1000, Height=0.028inch, Length=0.063inch, Mount="Surface Mount", Number of Pins=4, Packaging="Tape and Reel", RoHS Compliant=Yes, Termination=SMD/SMT, Width=0.047inch

## Via types
v1: diameter 50, hole 28, Top Layer to Bottom Layer, 35 vias
v2: diameter 7, hole 7, Top Layer to Bottom Layer, 19 vias
v3: diameter 23.62, hole 11.81, Top Layer to Bottom Layer, 4 vias

## Nets (pads, with @x,y where several pads share a name; then routed paths per layer and width w, separated by ;. In a path a pad name is that pad's centre, name@x,y a point inside that pad or via, vN(x,y) a via of type N, cw(c..) or ccw(c..) an arc to the next point about the centre after c; other vN are vias at no path point)
+5V: C1.1 C2.1 C3.1 C4.1 C5.1 C_LED.1 C_Osc.1 IC1.3 R_SD.2 R_SMC.2 U1.2 U1.14 U1.24 U1.34 U1.44 U2.4 UL1.1 UL2.1 UL3.1 UL4.1 UL5.1 UL6.1 UL7.1 UL8.1 UL9.1 UL10.1 Y1.1 Y1.4 | length 13327.8
  Top Layer w10: v2(3149.61,2637.8) 3185.04,2637.8 UL6.1 ; v2(3188.98,3996.06) 3194.88,4001.97 UL10.1 ; v2(3681.1,2145.67) 3716.54,2145.67 UL5.1 ; v2(3897.64,4389.76) 3897.64,4381.89 3903.54,4375.98 UL9.1 ; C1.1@4302.66,2983.76 4361.22,2925.2 U1.2 ; v1(4311.02,3307.09) IC1.3 ; U1.2@4392.37,2922.59 U1.2 ; U1.2@4392.37,2927.8 U1.2 ; v2(4429.13,3188.98) 4448.82,3169.29 4448.82,3168.31 4484.25,3132.87 C5.1 4484.25,3126.97 4456.69,3099.41 U1.44 4457.19,3023.13 4457.19,2959.6 4475.35,2941.44 4515.93,2941.44 4521.79,2935.58 4521.79,2927.3 4519.69,2925.2 U1.14@4519.69,2611.72 ; v2(4488.19,2066.93) 4519.69,2066.93 UL4.1 ; v2(4507.87,2421.26) C2.1 4507.87,2502.05 4519.69,2513.87 U1.14 4519.69,2607.03 4524.37,2611.72 4524.37,2614.45 4583.15,2673.23 U1.24@4801.67,2673.23 ; v2(4704.72,2401.57) 4708.66,2405.51 Y1.4 ; v2(4704.72,4271.65) UL8.1 ; Y1.1 4740.16,2405.51 v2(4744.09,2401.57) ; C3.1 4783.46,3067.66 4771.65,3055.85 4771.65,2969.04 4775.09,2965.6 4775.09,2939.92 4771.65,2936.47 4771.65,2705.19 4798.93,2677.91 4801.67,2677.91 4806.35,2673.23 U1.24 4961.61,2673.23 4977.36,2657.48 C4.1 v2(4980.31,2696.85) ; v2(4842.52,2381.89) C_Osc.1 ; U2.4 5076.77,2836.61 v2(5078.74,2834.65) ; v2(5078.74,2007.87) 5084.6,2013.73 5098.43,2013.73 5098.43,2043.31 UL1.1 5105.24,2061.93 5105.24,2132.8 5118.11,2145.67 C_LED.1 ; v2(5295.28,2795.28) R_SMC.2 ; v2(5334.65,3976.38) 5334.65,3972.44 5383.86,3923.23 UL7.1 ; v2(5492.13,2795.28) 5492.13,2849.18 R_SD.2 ; UL3.1 5939.02,3202.76 v2@5944.88,3208.61 ; v2(5925.2,2795.28) 5931.1,2789.37 UL2.1
  MID_1 w10: v1(4291.34,2972.44) 4260.34,3003.44 4260.34,3256.4 v1(4311.02,3307.09) v2(4429.13,3188.98) ; v2(4842.52,2381.89) 4789.32,2381.89 4783.46,2387.75 4783.46,2395.72 4777.61,2401.57 v2(4744.09,2401.57) v2(4704.72,2401.57) 4665.35,2401.57 4645.67,2421.26 v2(4507.87,2421.26) 4488.19,2401.57 v2(4488.19,2066.93) 4448.82,2106.3 3720.47,2106.3 v2(3681.1,2145.67) 3582.68,2145.67 3149.61,2578.74 v2(3149.61,2637.8) 3149.61,3956.69 v2(3188.98,3996.06) 3582.68,4389.76 v2(3897.64,4389.76) 4586.61,4389.76 v2(4704.72,4271.65) 5000,3976.38 v2(5334.65,3976.38) 5944.88,3366.14 v2(5944.88,3208.66) 5944.88,2814.96 v2(5925.2,2795.28) 5137.8,2007.87 v2(5078.74,2007.87) ; v2(4980.31,2696.85) 5078.74,2795.28 v2(5078.74,2834.65) 5118.11,2795.28 v2(5295.28,2795.28) v2(5492.13,2795.28)
+5V_IN_MAIN: CBus.1 J1.A4-B9 J1.B4-A9 U1.7 U_BAC.4 | length 1802.5
  Top Layer w10: U_BAC.4 3676.63,3562.99 3482.66,3369.02 3458.78,3369.02 J1.A4-B9 3448.03,3366.14 3431.05,3366.14 3423.33,3358.42 3423.33,3179.09 3446.11,3179.09 J1.B4-A9 3462.8,3173.23 3469.61,3166.42 3469.61,3165.4 3475.46,3159.54 3477.09,3159.54 3480.61,3156.03 3480.61,3113.88 3818.9,2775.59 3974.46,2775.59 3980.31,2769.73 CBus.1 4329.72,2736.22 4361.22,2767.72 U1.7
ALERT: U1.27 U2.1 | length 318.8
  Top Layer w10: U1.27 4867.13,2767.72 5042.32,2942.91 U2.1
CS1: U2.16
CS2: U2.15
CS3: U2.14
CS4: U2.13
CS5: U2.12
CS6: U2.11
CS7: U2.10
CS8: U2.9
GND: C1.2 C2.2 C3.2 C4.2 C5.2 C_LED.2 C_Osc.2 C_Saf.2 C_UCap.2 CBus.2 CRef.2 IC1.2 J1.A1-B12 R_PROG.2 RDD.2 RP1.1 RP2.1 SW1.3 SW1.4 U1.5 U1.15 U1.23 U1.35 U1.43 U2.7 U2.8 U2.17 U_BAC.2 UL1.3 UL2.3 UL3.3 UL4.3 UL5.3 UL6.3 UL7.3 UL8.3 UL9.3 UL10.3 Y1.2 | length 14616
  Top Layer w10: v1(3377.47,3403.18) 3380.36,3400.29 3417.43,3400.29 3430.83,3386.89 3445.16,3386.89 J1.A1-B12 ; UL6.3 3385.83,2511.81 v1(3385.83,2460.63) ; v1(3523.62,3366.14) RP1.1 ; v1(3602.36,3110.24) RP2.1 ; U_BAC.2 4234.25,3525.59 4253.54,3544.88 IC1.2 ; UL5.3 3921.26,2027.56 v1(3976.38,2027.56) ; CBus.2 3933.07,2509.84 SW1.3@4024.61,2418.31 ; v1(3996.06,2401.57) 4007.87,2401.57 SW1.3@4024.61,2418.31 ; RDD.2 4171.65,3405.51 IC1.2 ; C_UCap.2 4345.72,2842.52 4357.53,2830.71 U1.5 4444.88,2830.71 v1(4448.82,2834.65) ; C1.2@4288.39,3039.37 C1.2 4299.21,3031.5 4292.73,3031.5 v1(4291.34,3032.89) ; v1(4488.19,2972.44) U1.43 ; C5.2 4531.5,3132.87 4571.85,3173.23 CRef.2 ; U1.15 4548.57,2577.41 4548.57,2616.78 4555.65,2623.85 4566.79,2623.85 4582.55,2639.61 v1(4593.37,2639.61) ; C3.2 4738.19,3167.32 4738.19,3025.59 U1.35 4742.76,3021.02 4742.76,2973.77 4744.09,2972.44 v1(4744.09,2952.76) ; v1(4783.92,2639.11) 4785.23,2637.8 4803.15,2637.8 4807.09,2641.73 U1.23 4945.87,2641.73 4977.36,2610.24 C4.2 ; v1(4842.52,2480.32) C_Osc.2 4725.02,2468.5 4720.99,2464.47 4558.96,2464.47 C2.2 4555.12,2457.68 4518.87,2421.43 4518.87,2416.7 4512.43,2410.26 4366.01,2410.26 4357.96,2418.31 SW1.4 SW1.3 SW1.3@4024.61,2418.31 ; v1(4901.57,3543.31) 4841.54,3543.31 4839.96,3544.88 IC1.2 ; v3(5155.51,2895.67) 5147.64,2887.8 U2.7 U2.8 ; v1(5216.54,2283.46) 5216.54,2248.03 UL1.3 5328.74,2242.13 C_LED.2
  Bottom Layer w10: v1(3377.47,3403.18) 3383.41,3397.24 3383.41,3368.56 3389.27,3362.7 3445.49,3362.7 3448.93,3366.14 v1(3523.62,3366.14) ; 3413.86,2489.16 3385.83,2461.12 v1(3385.83,2460.63) 3937.01,2460.63 v1(3996.06,2401.57) 3996.06,2058.07 3976.38,2038.38 v1(3976.38,2027.56) ; v1(3602.36,3110.24) 3712.82,3220.69 3712.82,3240.38 v1(3720.47,3248.03) 3641.73,3248.03 v1(3523.62,3366.14) ; v1(4291.34,3032.89) 4351.79,2972.44 v1(4488.19,2972.44) ; v1(4448.82,2834.65) 4488.19,2874.02 v1(4488.19,2972.44) ; v1(4593.37,2639.61) 4593.62,2639.36 v1@4783.67,2639.36 ; v1(4763.78,1929.13) 4852.02,2017.37 v1@4852.02,2459.99 ; v1@4783.46,2637.8 4783.46,2638.66 v1(4783.92,2639.11) v1@4783.67,2639.36 ; v1(4842.52,2480.32) 5019.69,2480.32 v1(5216.54,2283.46) 5590.55,2283.46 v1(5807.09,2500) 5807.09,3188.98 v1(5669.29,3326.77) 5669.29,3740.16 v1(5610.24,3799.21) 5334.65,3799.21 v1(5000,4133.86) ; v3(5155.51,2931.1) v3(5155.51,2895.67) v3(5120.08,2895.67) v3(5120.08,2931.1) 5098.43,2952.76 ; v1(3523.62,3366.14) 3523.62,3847.44 3503.94,3867.13 v1(3503.94,3877.95) 3818.9,3877.95 v1(4192.91,4251.97) 4311.02,4133.86 v1(5000,4133.86) ; v1(4488.19,2972.44) 4713.59,2972.44 4733.27,2952.76 v1(4744.09,2952.76) ; v1(4744.09,2952.76) 4744.09,2678.94 v1@4783.67,2639.36 ; v1(4744.09,2952.76) 5098.43,2952.76 ; v1(5000,4133.86) 5000,3641.73 v1(4901.57,3543.31) 4901.57,3149.61 5098.43,2952.76
NetC_UCap_1: C_UCap.1 U1.6 | length 139.4
  Top Layer w10: C_UCap.1 4253.94,2797.24 4387.8,2797.24 U1.6
NetCRef_1: CRef.1 U1.42 | length 169.4
  Top Layer w10: U1.42 4519.69,3055.85 4527.56,3063.73 4527.56,3070.87 4547.24,3090.55 4600.44,3090.55 4606.3,3096.41 CRef.1
NetDS1_1: DS1.1 U_BAC.1 | length 83.5
  Top Layer w10: DS1.1 3838.58,3407.48 U_BAC.1
NetDS1_2: DS1.2 RDD.1 | length 116.1
  Top Layer w10: DS1.2 RDD.1
NetJ1_A5: J1.A5 RP1.2 | length 262.4
  Top Layer w10: J1.A5 3631.57,3316.93 3637.43,3322.79 3637.43,3331.07 3628.48,3340.03 3610.83,3340.03 3587.22,3363.64 RP1.2
NetJ1_A6: J1.A6 J1.B7 U1.4 | length 1357.7
  Top Layer w10: J1.B7 J1.A6 3637.84,3277.56 3824.85,3090.55 4403.59,3090.55 4438.33,3055.81 4438.33,2882.23 4418.31,2862.2 U1.4 U1.4@4360.36,2862.2
NetJ1_A7: J1.A7 J1.B6 U1.3 | length 1102.8
  Top Layer w10: J1.A7 J1.B6 3631.89,3238.19 3799.21,3070.87 4153.54,3070.87 4260.34,2964.07 4260.34,2959.6 4278.5,2941.44 4282.97,2941.44 4330.71,2893.7 U1.3
NetJ1_B5: J1.B5 RP2.2 | length 160.7
  Top Layer w10: J1.B5 3574.88,3198.82 3599.86,3173.83 RP2.2
NetR_LED_2: R_LED.2 UL1.4 | length 288.4
  Top Layer w10: UL1.4 5079.8,2254.84 5079.8,2301.13 5078.74,2302.19 5078.74,2336.66 5084.6,2342.52 5118.11,2342.52 5137.8,2362.2 5137.8,2479.29 R_LED.2
NetR_PROG_1: R_PROG.1 U_BAC.5 | length 118.8
  Top Layer w10: R_PROG.1 3729,3386.85 3750.69,3408.55 U_BAC.5
NetSW1_1: SW1.1 SW1.2 U1.13 | length 506
  Top Layer w10: SW1.1 SW1.2 4451.3,2502.95 4485.58,2537.23 4485.58,2572.2 U1.13
NetU1_17: U1.17 Y1.3 | length 170.9
  Top Layer w10: U1.17 4614.17,2511.81 4625.98,2500 4690.94,2500 4701.85,2489.09 4703.82,2489.09 4708.66,2484.25 Y1.3
NetUL1_2: UL1.2 UL2.4 | length 944.8
  Top Layer w10: UL1.2 5494.09,2049.21 5925.2,2480.32 5925.2,2535.43 UL2.4
NetUL2_2: UL2.2 UL3.4 | length 575.7
  Top Layer w10: UL3.4 5773.62,3202.76 5826.77,3149.61 5826.77,2740.11 5807.04,2740.11 UL2.2
NetUL3_2: UL3.2 UL4.4 | length 2598.2
  Top Layer w10: UL4.4 4728.35,2066.93 4862.2,2066.93 5019.69,1909.45 5393.7,1909.45 6062.99,2578.74 6062.99,3326.77 6057.09,3332.68 UL3.2
NetUL4_2: UL4.2 UL5.4 | length 704.3
  Top Layer w10: UL5.4 3927.17,2151.57 4149.61,1929.13 UL4.2
NetUL5_2: UL5.2 UL6.4 | length 803
  Top Layer w10: UL6.4 UL6.4 3419.34,2643.65 3425.2,2637.8 3425.2,2456.16 3409.45,2440.41 3409.45,2322.83 3710.63,2021.65 UL5.2
NetUL6_2: UL6.2 UL7.4 | length 5220.7
  Top Layer w10: UL6.2 3202.76,2513.78 3215.47,2501.06 3215.47,2472.89 3837.97,1850.39 5393.7,1850.39 6102.36,2559.06 6102.36,3641.73 5807.09,3937.01 5710.63,3937.01 5709.57,3935.94 5601.3,3935.94 UL7.4
NetUL7_2: UL7.2 UL8.4 | length 684.5
  Top Layer w10: UL8.4 4972.44,4271.65 5344.58,3899.51 5368.16,3899.51 5374.02,3893.65 5374.02,3806.02 5386.73,3793.31 UL7.2
NetUL8_2: UL8.2 UL9.4 | length 775.7
  Top Layer w10: UL9.4 4157.48,4370.08 4370.08,4370.08 4488.19,4251.97 4625.98,4251.97 4630.02,4247.94 4684.6,4247.94 4691.88,4240.65 4717.56,4240.65 4724.85,4247.94 4757.92,4247.94 4763.78,4242.08 4763.78,4145.67 UL8.2
NetUL9_2: UL9.2 UL10.4 | length 597.2
  Top Layer w10: UL10.4 3474.41,4001.97 3718.5,4246.06 UL9.2
PD5: R_LED.1 U1.22 | length 335.8
  Top Layer w10: U1.22 4771.65,2565.35 4777.95,2559.06 5013.83,2559.06 5019.69,2553.2 5019.69,2481.34 R_LED.1
SMCLK: R_SMC.1 U1.31 U2.3 | length 1127.4
  Top Layer w10: U1.31 4954.77,2893.7 5019.69,2958.61 5019.69,3045.32 5025.54,3051.18 5230.36,3051.18 5236.22,3045.32 5236.22,2933.07 ; U2.3 5019.69,2846.46 5019.69,2820.82 5025.54,2814.96 5230.36,2814.96 5236.22,2820.82 5236.22,2933.07 ; R_SMC.1 5236.22,2933.07
SMDATA: R_SD.1 U1.32 U2.2 | length 1639.1
  Top Layer w10: U1.32 4952.76,2925.2 5000,2972.44 5000,3084.69 5005.86,3090.55 5359.71,3090.55 5365.56,3084.69 5365.56,2801.48 5359.36,2795.28 ; U2.2 5049.21,2923.23 4980.31,2854.33 4980.31,2814.96 5031,2764.28 5328.36,2764.28 5359.36,2795.28 ; R_SD.1 5431.64,2854.33 5372.58,2795.28 5359.36,2795.28
V_BATT: C_Saf.1 IC1.1 U_BAC.3 | length 2039.8
  Top Layer w10: 3129.92,3740.16 3582.68,3740.16 3681.1,3838.58 4389.76,3838.58 4389.76,3723.62 IC1.1 4221.26,3555.12 C_Saf.1 3988.19,3562.99 U_BAC.3
pads on no net: J1. J1.1 J1.2 J1.3 J1.4 J1.A8 J1.B1-A12 J1.B8 U1.1 U1.8 U1.9 U1.10 U1.11 U1.12 U1.16 U1.18 U1.19 U1.20 U1.21 U1.25 U1.26 U1.28 U1.29 U1.30 U1.33 U1.36 U1.37 U1.38 U1.39 U1.40 U1.41 U2.5 U2.6 UL10.2
copper on no net:
  other v1: 3346.46,2066.93 5866.14,2066.93 4291.34,2283.46 5511.81,2598.43 3543.31,2755.91 4704.72,3996.06 4251.97,4015.75 6062.99,4035.43 3366.14,4311.02 5354.33,4488.19

## Polygon pours and split planes (outlines as drawn)
no net on Bottom Layer "NONET_L04_P001" (solid, pour order 1): 3661.42,4547.24 3159.21,4045.04 ccw(c3229.92,3974.33) 3129.92,3974.33 3129.92,2303.15 3612.44,1820.63 ccw(c3683.15,1891.34) 3683.15,1791.34 5472.44,1791.34 ccw(c5472.44,1838.86) 5506.05,1805.26 6161.42,2460.63 6161.42,3996.06 ccw(c6066.37,3996.06) 6133.58,4063.27 5669.29,4527.56 ccw(c5621.77,4480.04) 5621.77,4547.24